# Altium PCB MSP432_MAIN(1).PcbDoc (part 2 of 2)
Units mil, origin at the board's own origin, x right, y up, seen from the top; angles counter-clockwise.
Board outline 3910 x 2910 mil, 2 copper layers (Top Layer, Bottom Layer); 62 components, 84 nets, 279 pads, 146 vias.
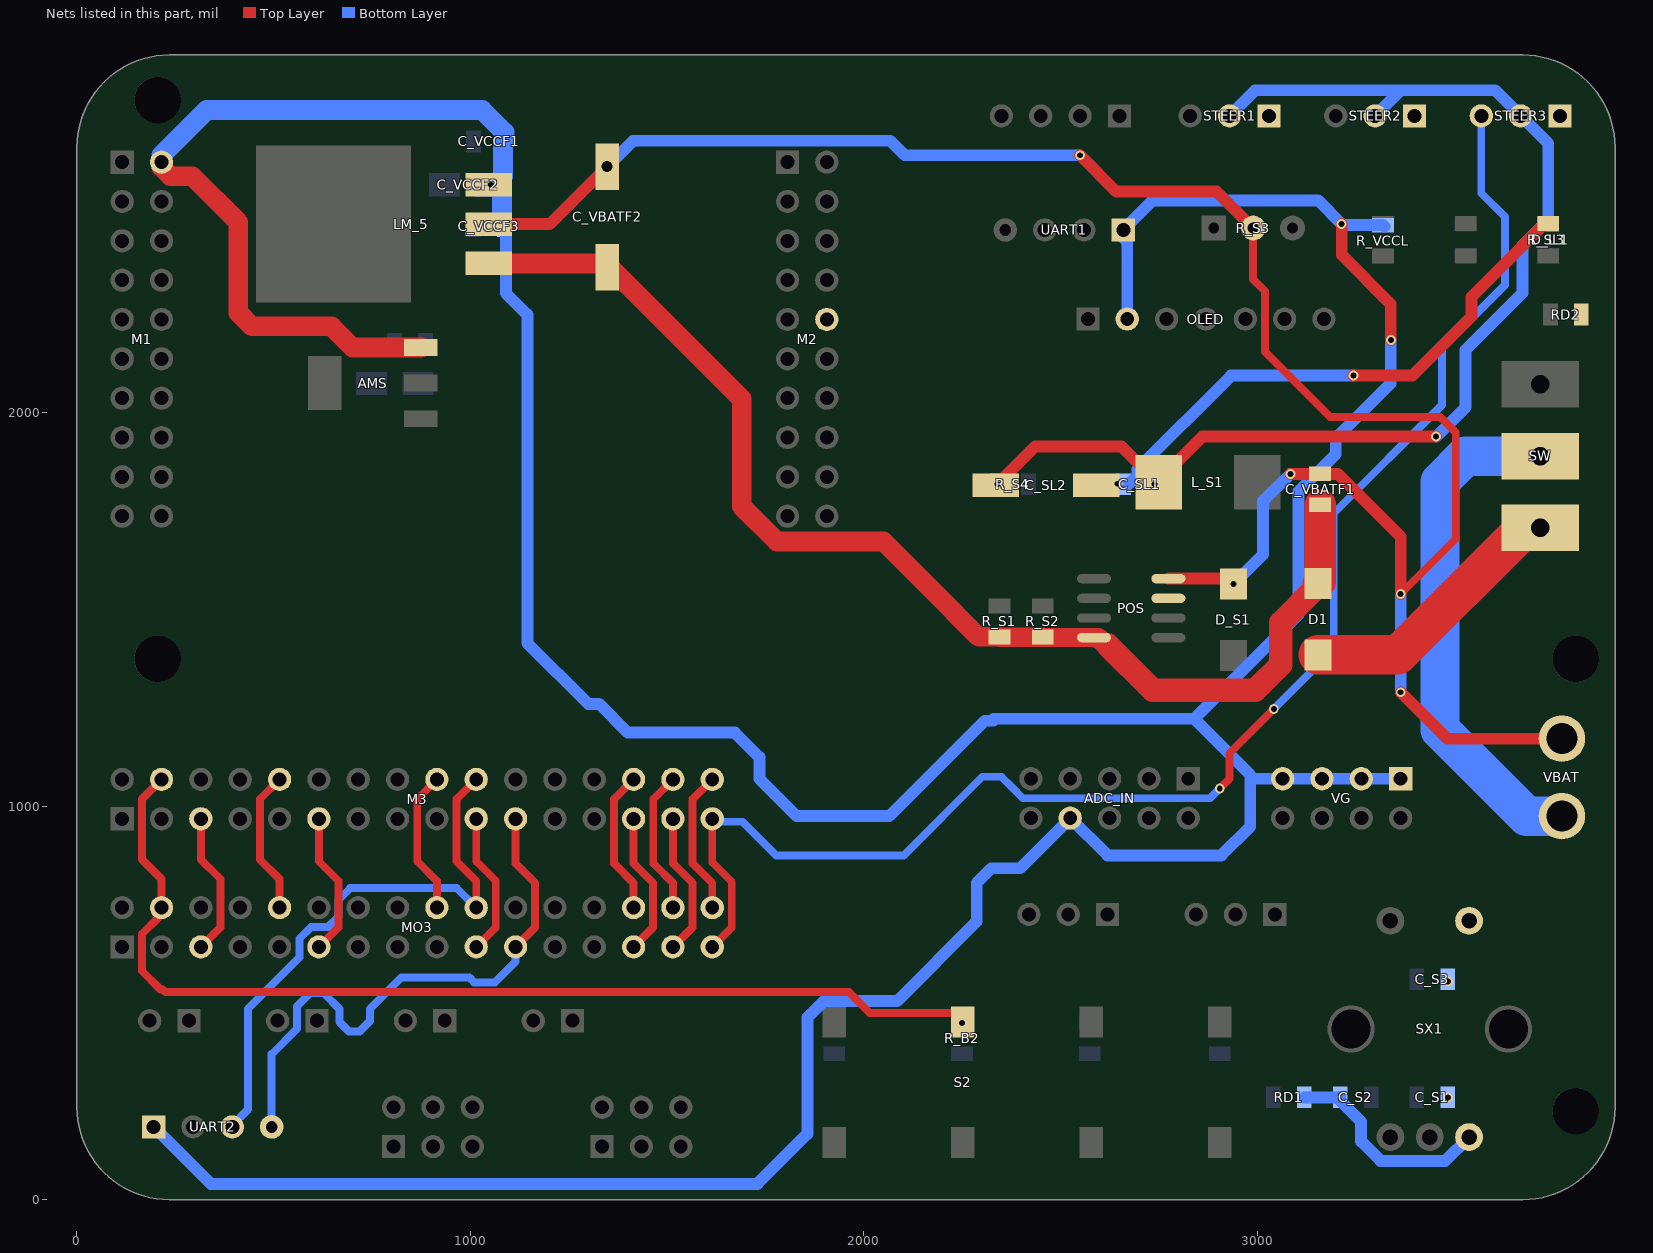
[diagram p2: the nets of this part, all layers, seen from the top]

## Via types
v1: diameter 25, hole 15, Top Layer to Bottom Layer, 145 vias
v2: diameter 50, hole 28, Top Layer to Bottom Layer, 1 vias

## Nets (pads, with @x,y where several pads share a name; then routed paths per layer and width w, separated by ;. In a path a pad name is that pad's centre, name@x,y a point inside that pad or via, vN(x,y) a via of type N, cw(c..) or ccw(c..) an arc to the next point about the centre after c; other vN are vias at no path point) (continued)
P9.0: M3.4 MO3.4 R_B2.2 S2.1 | length 2687.9
  Top Layer w20: M3.4@215,1068.19 165.47,1018.66 165.47,864.53 215,815 MO3.4@215,742.48 207.53,735.01 207.53,717.53 165,675 165,582.02 212.49,534.53 217.94,534.53 224.97,527.5 1962.5,527.5 2015,475 2224.37,475 v1(2250,449.37)
P9.1: M3.5 MO3.5 | length 366.7
  Top Layer w20: MO3.5@315,642.48 364.53,692.01 364.53,815.47 315,865 M3.5@315,968.19
P9.2: M3.10 MO3.10 | length 367.1
  Top Layer w20: MO3.10@515,742.48 515,815 465,865 465,1018.19 M3.10@515,1068.19
P9.3: M3.11 MO3.11 | length 366.7
  Top Layer w20: MO3.11@615,642.48 664.53,692.01 664.53,810.47 615,860 M3.11@615,968.19
P9.4: M3.18 MO3.18 | length 367.1
  Top Layer w20: MO3.18@915,742.48 915,810 865,860 865,1018.19 M3.18@915,1068.19
P9.5: M3.19 MO3.19 | length 366.7
  Top Layer w20: MO3.19@1015,642.48 1064.53,692.01 1064.53,810.47 1015,860 M3.19@1015,968.19
P9.6: M3.20 MO3.20 UART2.3 | length 1464.1
  Top Layer w20: MO3.20@1015,742.48 1015,810 965,860 965,1018.19 M3.20@1015,1068.19
  Bottom Layer w20: UART2.3@395,185 395,189.18 435,229.18 435,485 565.47,615.47 565.47,663 595.43,692.95 637.95,692.95 664.53,719.53 664.53,762.05 694.49,792.01 965.47,792.01 MO3.20@1015,742.48
P9.7: M3.21 MO3.21 UART2.4 | length 1468.5
  Top Layer w20: MO3.21@1115,642.48 1164.53,692.01 1164.53,805.33 1115,854.86 M3.21@1115,968.19
  Bottom Layer w20: UART2.4@495,185 495,369.96 559.53,434.48 559.53,491.87 592.66,525 627.34,525 667.44,484.9 667.44,451.6 691.54,427.5 718.46,427.5 745,454.04 745,485 824.53,564.53 997.66,564.53 1009.69,552.5 1062.5,552.5 1115,605 MO3.21@1115,642.48
P10.0: M3.28 MO3.28 | length 367.1
  Top Layer w20: MO3.28@1415,742.48 1415,805 1365,855 1365,1018.19 M3.28@1415,1068.19
P10.1: M3.27 MO3.27 | length 366.7
  Top Layer w20: MO3.27@1415,642.48 1464.53,692.01 1464.53,805.47 1415,855 M3.27@1415,968.19
P10.2: M3.30 MO3.30 | length 367.1
  Top Layer w20: MO3.30@1515,742.48 1515,805 1465,855 1465,1018.19 M3.30@1515,1068.19
P10.3: M3.29 MO3.29 | length 366.7
  Top Layer w20: MO3.29@1515,642.48 1564.53,692.01 1564.53,805.47 1515,855 M3.29@1515,968.19
P10.4: M3.32 MO3.32 | length 367.1
  Top Layer w20: MO3.32@1615,742.48 1615,805 1565,855 1565,1018.19 M3.32@1615,1068.19
P10.5: M3.31 MO3.31 STEER3.3 | length 3846.1
  Top Layer w20: MO3.31@1615,642.48 1664.53,692.01 1664.53,807.9 1615,857.43 M3.31@1615,968.19 ; v1(2905,1045) 2930,1070 2930,1135 v1(3042.5,1247.5)
  Bottom Layer w20: M3.31@1615,968.19 1622.47,960.72 1691.86,960.72 1777.57,875 2101.46,875 2301.46,1075 2350,1075 2375.47,1049.53 ; 2375.47,1049.49 2404.49,1020.47 2880.47,1020.47 v1(2905,1045) ; v1(3042.5,1247.5) 3195,1400 3195,1745 3470,2020 3470,2165 3630,2325 3630,2498.5 3570,2558.5 STEER3.3@3570,2755
RST: M2.10
STEERGND: C_SL1.1 C_SL2.2 D_L3.2 RD2.1 STEER1.1 STEER2.1 STEER3.1 | length 1392.8
  Top Layer w30: v1(3245,2095) 3395,2095 3545.28,2245.28 3545.28,2295 3731.62,2481.34 D_L3.2@3740.48,2481.34
  Bottom Layer w30: C_SL1.1@2660.63,1818.7 2673.7,1818.7 2695.67,1840.67 2695.67,1856.62 2934.05,2095 v1(3245,2095)
  other v1: 2645,1820
VBAT: C_VBATF1.2 C_VBATF2.1 D1.2 LM_5.1 POS.4 R_S1.1 R_S2.1 | length 3088.5
  Top Layer w40: POS.4@2585.51,1428.7 POS.4@2596.3,1428.7
  Top Layer w50: LM_5.1@1046.48,2380 1345.47,2380 1690,2035.47 1690,1762.56 1779.61,1672.95 2049.87,1672.95 2230.32,1492.5 ; 2232.5,1490.32 2292.2,1430.63 R_S1.1@2345,1430.63 ; R_S1.1@2345,1429.33 2455,1429.33 POS.4@2585.51,1428.7 ; POS.4@2596.3,1428.7 2615,1410
  Top Layer w60: 2620,1410 2735,1295 2995,1295 3060,1360 3060,1466.18 3155,1561.18 D1.2@3155,1566.1
  Top Layer w80: D1.2@3155,1566.1 3160,1571.1 C_VBATF1.2@3160,1766.26
VBATGND: C_S1.1 C_S2.1 C_S3.1 C_VBATF1.1 C_VBATF2.2 D_S1.1 LM_5.2 POS.7 POS.8 R_S3.2 RD1.1 SX1.1 SX1.4 VBAT.2 | length 5745.1
  Top Layer w20: R_S3.2@2990,2470 2990,2339.18 3020,2309.18 3020,2155.5 3185.5,1990 3465,1990 3505,1950 3505,1680 v1(3365,1540)
  Top Layer w30: LM_5.2@1046.48,2480 1201.78,2480 v2(1347.8,2626.03) ; v1(2550,2655) 2642.52,2562.48 2897.52,2562.48 R_S3.2@2990,2470 ; POS.8@2774.49,1578.7 2926.3,1578.7 v1(2940,1565) ; v1(3085,1845) C_VBATF1.1@3160,1845 3205,1845 3365,1685 v1(3365,1540) ; v1(3365,1290) 3483.15,1171.85 VBAT.2@3775,1171.85
  Bottom Layer w30: v2(1347.8,2626.03) 1413.78,2692.01 2067.22,2692.01 2104.23,2655 v1(2550,2655) ; v1(2940,1565) 3015,1640 3015,1775 v1(3085,1845) ; RD1.1@3120,260 C_S2.1@3211.26,260 3211.26,251.14 3264.43,197.97 3264.43,148.04 3313.9,98.57 3478.5,98.57 SX1.1@3538.94,159 ; v1(3365,1290) v1(3365,1540)
  other v1: 3485,260 3485,555
VCC: ADC_IN.8 AMS.3 C_VCCF1.2 C_VCCF2.1 C_VCCF3.2 LM_5.3 M1.2 OLED.2 R_VCCL.2 UART1.1 UART2.1 VG.1 VG.3 VG.5 VG.7 | length 12004.8
  Top Layer w30: v1(3215,2480) 3215,2401.57 3340,2276.57 v1(3340,2185)
  Top Layer w50: M1.2@215,2637.48 215,2625 237.99,2602.01 292.99,2602.01 410,2485 410,2255 445,2220 647.13,2220 700.98,2166.15 AMS.3@873.98,2166.15
  Bottom Layer w30: UART2.1@195,185 340,40 1730,40 1857.01,167.01 1857.01,462.99 1899.01,505 2085,505 2287.5,707.5 2287.5,805.53 2324.47,842.5 2397.5,842.5 ADC_IN.8@2525,970 2620,875 2909.5,875 2982.5,948 2982.5,1080 2840,1222.5 ; C_VCCF3.2@1086.85,2475 1086.85,2466.14 1090.55,2462.44 1090.55,2304.45 1145,2250 1145,1414.89 1299.56,1260.33 1327.25,1260.33 1400.08,1187.5 1672.5,1187.5 1735,1125 1735,1070 1830,975 2065,975 2307.5,1217.5 2330,1217.5 ; 2330,1222.5 2840,1222.5 ; OLED.2@2670,2238.7 2670,2435 2660,2445 UART1.1@2660,2465 2735,2540 3155,2540 v1(3215,2480) 3217.6,2477.4 R_VCCL.2@3320,2477.4 R_VCCL.2@3323.7,2473.7 ; 2990,1070 VG.7@3065,1070 VG.5@3165,1070 VG.3@3265,1070 VG.1@3365,1070 ; v1(3340,2185) 3340,2075 3200,1935 3200,1895 3105,1800 3105,1487.5 2840,1222.5
  Bottom Layer w50: M1.2@215,2637.48 215,2655 330,2770 1030,2770 1086.85,2713.15 C_VCCF1.2@1086.85,2690 ; v1(1052.48,2580) 1062.32,2580 1083.11,2600.79 C_VCCF1.2@1083.11,2690 ; C_VCCF2.1@1080.55,2561.77 1080.55,2477.56 1083.11,2475 C_VCCF3.2@1086.85,2475
VCC_STEER: C_SL1.2 C_SL2.1 L_S1.2 R_S4.1 R_SL1.2 STEER1.2 STEER2.2 STEER3.2 | length 3107.8
  Top Layer w30: v1(2340,1818.7) 2436.3,1915 2655,1915 2739.37,1830.63 v1(2739.37,1818.7) 2860.67,1940 v1(3455,1940)
  Bottom Layer w30: STEER1.2@2930,2755 2995,2820 3365,2820 ; STEER2.2@3300,2755 3365,2820 ; v1(3455,1940) 3530,2015 3530,2160 3675,2305 3675,2425.78 3731.62,2482.4 R_SL1.2@3740,2482.4 ; R_SL1.2@3740,2479.37 R_SL1.2@3740,2482.4 ; 3365,2820 3605,2820 STEER3.2@3670,2755 3740,2685 R_SL1.2@3740,2482.4
VINBAT: D1.1 SW.1 | length 698.8
  Top Layer w100: D1.1@3155,1385 3357.63,1385 3680.63,1708 SW.1@3720,1708
VINNBAT: SW.2 VBAT.1 | length 1313.1
  Bottom Layer w100: SW.2@3720,1890 3530,1890 3465,1825 3465,1195 3685,975 VBAT.1@3775,975
pads on no net: AMS.4 LM_5.4 R_S3.1 SW.3 SX1.6 SX1.7
copper on no net: | length 8936.2
  Bottom Layer w1.35: 775.76,1694.88 794.7,1694.88 ; 775.76,1696.24 794.7,1696.24 ; 775.76,1697.59 794.7,1697.59 ; 777.11,1692.18 790.64,1692.18 ; 777.11,1693.53 793.35,1693.53 ; 777.11,1698.94 793.35,1698.94 ; 777.11,1700.3 793.35,1700.3 ; 778.47,1669.18 825.82,1669.18 ; 778.47,1670.53 828.53,1670.53 ; 778.47,1671.88 829.88,1671.88 ; 778.47,1701.65 801.47,1701.65 ; 779.82,1667.82 823.12,1667.82 ; 779.82,1673.23 831.24,1673.23 ; 779.82,1703 801.47,1703 ; 781.17,1674.59 832.59,1674.59 ; 781.17,1675.94 802.82,1675.94 ; 781.17,1704.36 800.12,1704.36 ; 782.53,1705.71 797.41,1705.71 ; 783.88,1677.29 801.47,1677.29 ; 785.23,1678.65 801.47,1678.65 ; 785.23,1723.3 836.65,1723.3 ; 785.23,1724.65 836.65,1724.65 ; 785.23,1726 836.65,1726 ; 786.59,1666.47 819.06,1666.47 ; 786.59,1721.95 815,1721.95 ; 786.59,1727.36 836.65,1727.36 ; 786.59,1728.71 816.35,1728.71 ; 787.94,1680 801.47,1680 ; 787.94,1707.06 797.41,1707.06 ; 787.94,1730.06 813.65,1730.06 ; 789.29,1681.35 802.82,1681.35 ; 790.64,1682.71 802.82,1682.71 ; 792,1684.06 802.82,1684.06 ; 793.35,1685.41 804.18,1685.41 ; 793.35,1731.42 812.29,1731.42 ; 794.7,1686.77 804.18,1686.77 ; 796.06,1688.12 823.12,1688.12 ; 796.06,1698.94 804.18,1698.94 ; 796.06,1700.3 802.82,1700.3 ; 797.41,1689.47 823.12,1689.47 ; 797.41,1697.59 806.88,1697.59 ; 797.41,1736.83 812.29,1736.83 ; 797.41,1738.18 813.65,1738.18 ; 797.41,1739.54 813.65,1739.54 ; 797.41,1740.89 815,1740.89 ; 798.76,1690.82 823.12,1690.82 ; 798.76,1696.24 821.77,1696.24 ; 798.76,1734.12 812.29,1734.12 ; 798.76,1735.48 812.29,1735.48 ; 798.76,1742.24 816.35,1742.24 ; 800.12,1692.18 823.12,1692.18 ; 800.12,1693.53 821.77,1693.53 ; 800.12,1694.88 821.77,1694.88 ; 800.12,1732.77 812.29,1732.77 ; 800.12,1743.59 816.35,1743.59 ; 801.47,1744.95 815,1744.95 ; 802.82,1720.59 815,1720.59 ; 804.18,1716.53 817.71,1716.53 ; 804.18,1717.89 816.35,1717.89 ; 804.18,1719.24 816.35,1719.24 ; 804.18,1746.3 813.65,1746.3 ; 805.53,1685.41 821.77,1685.41 ; 805.53,1686.77 821.77,1686.77 ; 805.53,1713.83 819.06,1713.83 ; 805.53,1715.18 817.71,1715.18 ; 806.88,1680 815,1680 ; 806.88,1681.35 816.35,1681.35 ; 806.88,1682.71 819.06,1682.71 ; 806.88,1684.06 820.41,1684.06 ; 806.88,1712.47 820.41,1712.47 ; 808.23,1711.12 820.41,1711.12 ; 809.59,1697.59 821.77,1697.59 ; 809.59,1709.77 821.77,1709.77 ; 810.94,1698.94 821.77,1698.94 ; 810.94,1708.41 823.12,1708.41 ; 812.29,1707.06 832.59,1707.06 ; 813.65,1700.3 820.41,1700.3 ; 813.65,1705.71 827.18,1705.71 ; 816.35,1704.36 829.88,1704.36 ; 816.35,1721.95 839.36,1721.95 ; 819.06,1675.94 833.94,1675.94 ; 819.06,1703 831.24,1703 ; 821.77,1677.29 835.3,1677.29 ; 821.77,1716.53 851.53,1716.53 ; 821.77,1717.89 851.53,1717.89 ; 821.77,1719.24 851.53,1719.24 ; 821.77,1720.59 850.18,1720.59 ; 821.77,1728.71 838,1728.71 ; 821.77,1730.06 838,1730.06 ; 823.12,1678.65 835.3,1678.65 ; 823.12,1701.65 833.94,1701.65 ; 823.12,1709.77 833.94,1709.77 ; 823.12,1711.12 835.3,1711.12 ; 823.12,1712.47 850.18,1712.47 ; 823.12,1713.83 851.53,1713.83 ; 823.12,1715.18 851.53,1715.18 ; 823.12,1731.42 839.36,1731.42 ; 823.12,1732.77 839.36,1732.77 ; 823.12,1734.12 840.71,1734.12 ; 824.47,1680 836.65,1680 ; 824.47,1708.41 832.59,1708.41 ; 824.47,1735.48 842.06,1735.48 ; 825.82,1681.35 836.65,1681.35 ; 825.82,1682.71 852.89,1682.71 ; 825.82,1684.06 852.89,1684.06 ; 825.82,1736.83 843.41,1736.83 ; 827.18,1685.41 838,1685.41 ; 827.18,1686.77 838,1686.77 ; 827.18,1688.12 838,1688.12 ; 827.18,1689.47 838,1689.47 ; 827.18,1690.82 850.18,1690.82 ; 827.18,1692.18 850.18,1692.18 ; 827.18,1738.18 843.41,1738.18 ; 828.53,1693.53 848.83,1693.53 ; 828.53,1700.3 835.3,1700.3 ; 829.88,1694.88 842.06,1694.88 ; 831.24,1739.54 843.41,1739.54 ; 833.94,1696.24 840.71,1696.24 ; 836.65,1711.12 850.18,1711.12 ; 838,1680 855.59,1680 ; 838,1681.35 854.24,1681.35 ; 838,1740.89 843.41,1740.89 ; 839.36,1678.65 855.59,1678.65 ; 839.36,1685.41 851.53,1685.41 ; 839.36,1686.77 851.53,1686.77 ; 839.36,1688.12 850.18,1688.12 ; 839.36,1689.47 850.18,1689.47 ; 839.36,1709.77 850.18,1709.77 ; 840.71,1673.23 855.59,1673.23 ; 840.71,1674.59 855.59,1674.59 ; 840.71,1675.94 855.59,1675.94 ; 840.71,1677.29 855.59,1677.29 ; 842.06,1670.53 854.24,1670.53 ; 842.06,1671.88 855.59,1671.88 ; 843.41,1667.82 852.89,1667.82 ; 843.41,1669.18 852.89,1669.18 ; 843.41,1694.88 847.47,1694.88 ; 844.77,1666.47 851.53,1666.47 ; 867.77,1685.41 877.24,1685.41 ; 867.77,1686.77 875.89,1686.77 ; 867.77,1688.12 874.54,1688.12 ; 867.77,1705.71 892.12,1705.71 ; 867.77,1707.06 889.42,1707.06 ; 869.12,1684.06 879.95,1684.06 ; 869.12,1689.47 871.83,1689.47 ; 869.12,1701.65 881.3,1701.65 ; 869.12,1703 879.95,1703 ; 869.12,1704.36 893.48,1704.36 ; 869.12,1708.41 886.71,1708.41 ; 870.48,1682.71 881.3,1682.71 ; 870.48,1700.3 882.65,1700.3 ; 870.48,1709.77 884.01,1709.77 ; 871.83,1681.35 884.01,1681.35 ; 871.83,1697.59 884.01,1697.59 ; 871.83,1698.94 882.65,1698.94 ; 873.18,1680 902.95,1680 ; 873.18,1696.24 885.36,1696.24 ; 873.18,1711.12 879.95,1711.12 ; 874.54,1678.65 902.95,1678.65 ; 875.89,1677.29 902.95,1677.29 ; 875.89,1694.88 901.6,1694.88 ; 877.24,1675.94 901.6,1675.94 ; 877.24,1693.53 901.6,1693.53 ; 879.95,1674.59 901.6,1674.59 ; 879.95,1692.18 902.95,1692.18 ; 881.3,1673.23 900.24,1673.23 ; 881.3,1690.82 902.95,1690.82 ; 881.3,1703 894.83,1703 ; 882.65,1701.65 896.18,1701.65 ; 884.01,1671.88 898.89,1671.88 ; 884.01,1689.47 902.95,1689.47 ; 884.01,1700.3 897.54,1700.3 ; 885.36,1698.94 898.89,1698.94 ; 886.71,1697.59 898.89,1697.59 ; 888.07,1688.12 902.95,1688.12 ; 888.07,1696.24 900.24,1696.24 ; 889.42,1681.35 902.95,1681.35 ; 889.42,1682.71 902.95,1682.71 ; 890.77,1684.06 902.95,1684.06 ; 890.77,1685.41 902.95,1685.41 ; 890.77,1686.77 902.95,1686.77
  Bottom Layer w1.37: 740.56,1579.18 752.89,1579.18 ; 740.56,1580.54 751.52,1580.54 ; 740.56,1581.91 751.52,1581.91 ; 740.56,1583.28 751.52,1583.28 ; 740.56,1584.65 750.15,1584.65 ; 740.56,1586.02 750.15,1586.02 ; 740.56,1587.39 750.15,1587.39 ; 740.56,1588.76 750.15,1588.76 ; 740.56,1590.13 750.15,1590.13 ; 740.56,1591.5 750.15,1591.5 ; 740.56,1592.87 750.15,1592.87 ; 740.56,1594.24 777.54,1594.24 ; 740.56,1595.61 774.8,1595.61 ; 741.93,1575.07 754.26,1575.07 ; 741.93,1576.44 752.89,1576.44 ; 741.93,1577.81 752.89,1577.81 ; 741.93,1596.98 773.43,1596.98 ; 741.93,1598.35 772.06,1598.35 ; 743.3,1570.96 757,1570.96 ; 743.3,1572.33 755.63,1572.33 ; 743.3,1573.7 754.26,1573.7 ; 743.3,1599.72 770.69,1599.72 ; 744.67,1568.22 758.37,1568.22 ; 744.67,1569.59 757,1569.59 ; 744.67,1601.09 767.95,1601.09 ; 746.04,1565.48 759.74,1565.48 ; 746.04,1566.85 759.74,1566.85 ; 746.04,1602.46 765.21,1602.46 ; 746.04,1603.83 762.47,1603.83 ; 747.41,1562.74 762.47,1562.74 ; 747.41,1564.11 761.1,1564.11 ; 748.78,1560 765.21,1560 ; 748.78,1561.37 763.84,1561.37 ; 748.78,1605.2 758.37,1605.2 ; 750.15,1558.63 766.58,1558.63 ; 751.52,1555.89 769.32,1555.89 ; 751.52,1557.26 767.95,1557.26 ; 752.89,1554.52 770.69,1554.52 ; 752.89,1592.87 778.91,1592.87 ; 754.26,1553.15 773.43,1553.15 ; 755.63,1551.78 774.8,1551.78 ; 755.63,1591.5 780.28,1591.5 ; 757,1550.41 777.54,1550.41 ; 757,1590.13 781.65,1590.13 ; 758.37,1549.04 780.28,1549.04 ; 759.74,1547.67 793.98,1547.67 ; 761.1,1546.3 792.61,1546.3 ; 762.47,1544.93 792.61,1544.93 ; 762.47,1588.76 781.65,1588.76 ; 763.84,1543.56 791.24,1543.56 ; 765.21,1587.39 783.02,1587.39 ; 766.58,1542.19 789.87,1542.19 ; 766.58,1586.02 784.39,1586.02 ; 767.95,1540.82 788.5,1540.82 ; 767.95,1584.65 785.76,1584.65 ; 769.32,1583.28 785.76,1583.28 ; 770.69,1581.91 787.13,1581.91 ; 772.06,1539.46 785.76,1539.46 ; 772.06,1579.18 788.5,1579.18 ; 772.06,1580.54 788.5,1580.54 ; 773.43,1577.81 789.87,1577.81 ; 774.8,1575.07 791.24,1575.07 ; 774.8,1576.44 791.24,1576.44 ; 776.17,1573.7 792.61,1573.7 ; 777.54,1570.96 792.61,1570.96 ; 777.54,1572.33 792.61,1572.33 ; 778.91,1568.22 793.98,1568.22 ; 778.91,1569.59 793.98,1569.59 ; 780.28,1565.48 795.35,1565.48 ; 780.28,1566.85 793.98,1566.85 ; 781.65,1549.04 793.98,1549.04 ; 781.65,1561.37 795.35,1561.37 ; 781.65,1562.74 795.35,1562.74 ; 781.65,1564.11 795.35,1564.11 ; 783.02,1550.41 795.35,1550.41 ; 783.02,1551.78 795.35,1551.78 ; 783.02,1553.15 795.35,1553.15 ; 783.02,1554.52 795.35,1554.52 ; 783.02,1555.89 795.35,1555.89 ; 783.02,1557.26 795.35,1557.26 ; 783.02,1558.63 795.35,1558.63 ; 783.02,1560 795.35,1560 ; 788.5,1586.02 803.56,1586.02 ; 788.5,1587.39 802.19,1587.39 ; 788.5,1588.76 800.82,1588.76 ; 788.5,1590.13 799.46,1590.13 ; 788.5,1591.5 798.09,1591.5 ; 788.5,1592.87 798.09,1592.87 ; 788.5,1594.24 799.46,1594.24 ; 788.5,1595.61 830.96,1595.61 ; 788.5,1596.98 830.96,1596.98 ; 789.87,1583.28 806.3,1583.28 ; 789.87,1584.65 804.93,1584.65 ; 789.87,1598.35 829.59,1598.35 ; 789.87,1599.72 828.22,1599.72 ; 789.87,1601.09 825.48,1601.09 ; 791.24,1580.54 810.41,1580.54 ; 791.24,1581.91 809.04,1581.91 ; 791.24,1602.46 821.37,1602.46 ; 791.24,1603.83 817.26,1603.83 ; 792.61,1579.18 813.15,1579.18 ; 792.61,1605.2 810.41,1605.2 ; 793.98,1577.81 815.89,1577.81 ; 795.35,1576.44 817.26,1576.44 ; 796.72,1575.07 820,1575.07 ; 798.09,1554.52 813.15,1554.52 ; 799.46,1550.41 844.65,1550.41 ; 799.46,1551.78 826.85,1551.78 ; 799.46,1553.15 820,1553.15 ; 799.46,1555.89 807.67,1555.89 ; 799.46,1573.7 822.74,1573.7 ; 800.82,1547.67 844.65,1547.67 ; 800.82,1549.04 844.65,1549.04 ; 800.82,1572.33 825.48,1572.33 ; 802.19,1546.3 844.65,1546.3 ; 803.56,1544.93 844.65,1544.93 ; 803.56,1570.96 826.85,1570.96 ; 804.93,1543.56 843.28,1543.56 ; 804.93,1569.59 829.59,1569.59 ; 804.93,1594.24 832.33,1594.24 ; 807.67,1542.19 843.28,1542.19 ; 807.67,1568.22 830.96,1568.22 ; 809.04,1566.85 832.33,1566.85 ; 810.41,1540.82 841.91,1540.82 ; 810.41,1592.87 832.33,1592.87 ; 811.78,1565.48 833.7,1565.48 ; 813.15,1591.5 833.7,1591.5 ; 814.52,1539.46 840.54,1539.46 ; 814.52,1564.11 835.07,1564.11 ; 814.52,1581.91 835.07,1581.91 ; 814.52,1583.28 835.07,1583.28 ; 815.89,1562.74 837.81,1562.74 ; 815.89,1584.65 835.07,1584.65 ; 817.26,1580.54 835.07,1580.54 ; 817.26,1590.13 833.7,1590.13 ; 818.63,1561.37 837.81,1561.37 ; 818.63,1588.76 833.7,1588.76 ; 820,1560 839.18,1560 ; 821.37,1587.39 835.07,1587.39 ; 822.74,1558.63 840.54,1558.63 ; 822.74,1579.18 835.07,1579.18 ; 822.74,1586.02 835.07,1586.02 ; 824.11,1557.26 841.91,1557.26 ; 826.85,1538.09 836.44,1538.09 ; 826.85,1555.89 843.28,1555.89 ; 828.22,1554.52 843.28,1554.52 ; 830.96,1553.15 844.65,1553.15 ; 832.33,1551.78 844.65,1551.78 ; 839.18,1579.18 851.5,1579.18 ; 839.18,1580.54 850.13,1580.54 ; 839.18,1581.91 850.13,1581.91 ; 839.18,1583.28 850.13,1583.28 ; 839.18,1584.65 848.76,1584.65 ; 839.18,1586.02 848.76,1586.02 ; 839.18,1587.39 848.76,1587.39 ; 839.18,1588.76 848.76,1588.76 ; 839.18,1590.13 848.76,1590.13 ; 839.18,1591.5 848.76,1591.5 ; 839.18,1592.87 848.76,1592.87 ; 839.18,1594.24 876.16,1594.24 ; 839.18,1595.61 873.42,1595.61 ; 840.54,1575.07 852.87,1575.07 ; 840.54,1576.44 851.5,1576.44 ; 840.54,1577.81 851.5,1577.81 ; 840.54,1596.98 872.05,1596.98 ; 840.54,1598.35 870.68,1598.35 ; 841.91,1570.96 855.61,1570.96 ; 841.91,1572.33 854.24,1572.33 ; 841.91,1573.7 852.87,1573.7 ; 841.91,1599.72 869.31,1599.72 ; 843.28,1568.22 856.98,1568.22 ; 843.28,1569.59 855.61,1569.59 ; 843.28,1601.09 866.57,1601.09 ; 844.65,1565.48 858.35,1565.48 ; 844.65,1566.85 858.35,1566.85 ; 844.65,1602.46 863.83,1602.46 ; 844.65,1603.83 861.09,1603.83 ; 846.02,1562.74 861.09,1562.74 ; 846.02,1564.11 859.72,1564.11 ; 847.39,1560 863.83,1560 ; 847.39,1561.37 862.46,1561.37 ; 847.39,1605.2 856.98,1605.2 ; 848.76,1558.63 865.2,1558.63 ; 850.13,1555.89 867.94,1555.89 ; 850.13,1557.26 866.57,1557.26 ; 851.5,1554.52 869.31,1554.52 ; 851.5,1592.87 877.53,1592.87 ; 852.87,1553.15 872.05,1553.15 ; 854.24,1551.78 873.42,1551.78 ; 854.24,1591.5 878.9,1591.5 ; 855.61,1550.41 876.16,1550.41 ; 855.61,1590.13 880.26,1590.13 ; 856.98,1549.04 878.9,1549.04 ; 858.35,1547.67 892.59,1547.67 ; 859.72,1546.3 891.22,1546.3 ; 861.09,1544.93 891.22,1544.93 ; 861.09,1588.76 880.26,1588.76 ; 862.46,1543.56 889.85,1543.56 ; 863.83,1587.39 881.63,1587.39 ; 865.2,1542.19 888.48,1542.19 ; 865.2,1586.02 883,1586.02 ; 866.57,1540.82 887.11,1540.82 ; 866.57,1584.65 884.37,1584.65 ; 867.94,1583.28 884.37,1583.28 ; 869.31,1581.91 885.74,1581.91 ; 870.68,1539.46 884.37,1539.46 ; 870.68,1579.18 887.11,1579.18 ; 870.68,1580.54 887.11,1580.54 ; 872.05,1577.81 888.48,1577.81 ; 873.42,1575.07 889.85,1575.07 ; 873.42,1576.44 889.85,1576.44 ; 874.79,1573.7 891.22,1573.7 ; 876.16,1570.96 891.22,1570.96 ; 876.16,1572.33 891.22,1572.33 ; 877.53,1568.22 892.59,1568.22 ; 877.53,1569.59 892.59,1569.59 ; 878.9,1565.48 893.96,1565.48 ; 878.9,1566.85 892.59,1566.85 ; 880.26,1549.04 892.59,1549.04 ; 880.26,1561.37 893.96,1561.37 ; 880.26,1562.74 893.96,1562.74 ; 880.26,1564.11 893.96,1564.11 ; 881.63,1550.41 893.96,1550.41 ; 881.63,1551.78 893.96,1551.78 ; 881.63,1553.15 893.96,1553.15 ; 881.63,1554.52 893.96,1554.52 ; 881.63,1555.89 893.96,1555.89 ; 881.63,1557.26 893.96,1557.26 ; 881.63,1558.63 893.96,1558.63 ; 881.63,1560 893.96,1560 ; 887.11,1586.02 902.18,1586.02 ; 887.11,1587.39 900.81,1587.39 ; 887.11,1588.76 899.44,1588.76 ; 887.11,1590.13 898.07,1590.13 ; 887.11,1591.5 896.7,1591.5 ; 887.11,1592.87 896.7,1592.87 ; 887.11,1594.24 898.07,1594.24 ; 887.11,1595.61 929.57,1595.61 ; 887.11,1596.98 929.57,1596.98 ; 888.48,1583.28 904.92,1583.28 ; 888.48,1584.65 903.55,1584.65 ; 888.48,1598.35 928.2,1598.35 ; 888.48,1599.72 926.83,1599.72 ; 888.48,1601.09 924.09,1601.09 ; 889.85,1580.54 909.03,1580.54 ; 889.85,1581.91 907.66,1581.91 ; 889.85,1602.46 919.98,1602.46 ; 889.85,1603.83 915.88,1603.83 ; 891.22,1579.18 911.77,1579.18 ; 891.22,1605.2 909.03,1605.2 ; 892.59,1577.81 914.51,1577.81 ; 893.96,1576.44 915.88,1576.44 ; 895.33,1575.07 918.62,1575.07 ; 896.7,1554.52 911.77,1554.52 ; 898.07,1550.41 943.27,1550.41 ; 898.07,1551.78 925.46,1551.78 ; 898.07,1553.15 918.62,1553.15 ; 898.07,1555.89 906.29,1555.89 ; 898.07,1573.7 921.35,1573.7 ; 899.44,1547.67 943.27,1547.67 ; 899.44,1549.04 943.27,1549.04 ; 899.44,1572.33 924.09,1572.33 ; 900.81,1546.3 943.27,1546.3 ; 902.18,1544.93 943.27,1544.93 ; 902.18,1570.96 925.46,1570.96 ; 903.55,1543.56 941.9,1543.56 ; 903.55,1569.59 928.2,1569.59 ; 903.55,1594.24 930.94,1594.24 ; 906.29,1542.19 941.9,1542.19 ; 906.29,1568.22 929.57,1568.22 ; 907.66,1566.85 930.94,1566.85 ; 909.03,1540.82 940.53,1540.82 ; 909.03,1592.87 930.94,1592.87 ; 910.4,1565.48 932.31,1565.48 ; 911.77,1591.5 932.31,1591.5 ; 913.14,1539.46 939.16,1539.46 ; 913.14,1564.11 933.68,1564.11 ; 913.14,1581.91 933.68,1581.91 ; 913.14,1583.28 933.68,1583.28 ; 914.51,1562.74 936.42,1562.74 ; 914.51,1584.65 933.68,1584.65 ; 915.88,1580.54 933.68,1580.54 ; 915.88,1590.13 932.31,1590.13 ; 917.25,1561.37 936.42,1561.37 ; 917.25,1588.76 932.31,1588.76 ; 918.62,1560 937.79,1560 ; 919.98,1587.39 933.68,1587.39 ; 921.35,1558.63 939.16,1558.63 ; 921.35,1579.18 933.68,1579.18 ; 921.35,1586.02 933.68,1586.02 ; 922.72,1557.26 940.53,1557.26 ; 925.46,1538.09 935.05,1538.09 ; 925.46,1555.89 941.9,1555.89 ; 926.83,1554.52 941.9,1554.52 ; 929.57,1553.15 943.27,1553.15 ; 930.94,1551.78 943.27,1551.78
  other v1: 535,2400 652.5,2400 770,2400 535,2485 652.5,2485 770,2485 535,2570 652.5,2570 770,2570

## Polygon pours and split planes (outlines as drawn)
GND on Top Layer "Top Layer-GND" (solid, remove dead copper, pour order 6): -380,2640 210,3230 3735,3230 4545,2420 4545,670 3455,-420 3330,-295 -90,-295 -90,605 -290,805
VBATGND on Top Layer "Top Layer-VBATGND" (solid, remove dead copper, pour order 4): 3110,-20 3110,765 3200,855 3585,855 3635,905 3635,1230 3690,1285 3925,1285 3925,45 3845,-35
no net on Top Layer "Top Layer-No Net" (solid, pour order 2): 3060,15
STEERGND on Top Layer "Top Layer-STEERGND" (solid, remove dead copper, pour order 0): 2655,2620 2720,2685 2720,2915 3810,2915 3965,2760 3955,2205 3780,2205 3780,2280 3670,2390 3670,2590 3580,2680 3480,2580 2650,2580
GND on Bottom Layer "Bottom Layer-GND" (solid, remove dead copper, pour order 8): -90,2805 785,3680 3450,3680 4855,2275 4300,1720 4300,-495 425,-495 -65,-5

## Keep-outs
Keep-Out Layer:
  the board outline again, w10

## Other copper
Top Layer:
  rectangle net VBATGND: 2735,1525 2815,1590
  pour cut-out: 3605,2170 3825,2170 3860,2135 3860,2010 3835,1985 3605,1985 3580,2010 3580,2140
Bottom Layer:
  pour cut-out: 3605,2172.5 3825,2172.5 3860,2137.5 3860,2012.5 3835,1987.5 3605,1987.5 3580,2012.5 3580,2142.5

## Silkscreen, mask and mechanical layers (free items; w line width, h text height)
Top Overlay:
  text "P6.4" at 2315,2670 h19.68
  text "P6.5" at 2415,2670 h19.68
  text "GND" at 2525,2670 h19.68
  text "3.3V" at 2620,2670 h19.68
  text "P5.6" at 2795,2670 h19.68
  text "V_STR" at 2890,2670 h19.68
  text "GND" at 3005,2670 h19.68
  text "P5.7" at 3165,2670 h19.68
  text "V_STR" at 3260,2670 h19.68
  text "GND" at 3375,2670 h19.68
  text "P10.1" at 3535,2670 h19.68
  text "V_STR" at 3630,2670 h19.68
  text "GND" at 3745,2670 h19.68
  text "VCC" at 300,2610 h19.68 r90
  text "GND" at 1995,2610 h19.68 r90
  text "3.3V" at 45,2600 h19.68 r90
  text "P2.7" at 1735,2600 h19.68 r90
  text "P3.3" at 2330,2380 h19.68
  text "P3.2" at 2430,2380 h19.68
  text "GND" at 2535,2380 h19.68
  text "VCC" at 2635,2380 h19.68
  text "GND" at 2540,2155 h19.68
  text "VCC" at 2640,2155 h19.68
  text "VCC" at 3035,1140 h19.68
  text "VCC" at 3140,1140 h19.68
  text "VCC" at 3240,1140 h19.68
  text "VCC" at 3340,1140 h19.68
  text "P4.7" at 2390,1135 h19.68
  text "P4.5" at 2485,1135 h19.68
  text "GND" at 2595,1135 h19.68
  text "P4.4" at 2685,1135 h19.68
  text "P4.2" at 2790,1135 h19.68
  text "P8.5" at 40,1045 h19.68 r90
  text "P8.6" at 40,935 h19.68 r90
  text "VCC" at 2500,885 h19.68
  text "GND" at 2600,885 h19.68
  text "3.3V" at 2695,885 h19.68
  text "P4.0" at 2795,885 h19.68
  text "GND" at 3040,885 h19.68
  text "GND" at 3135,885 h19.68
  text "GND" at 3240,885 h19.68
  text "GND" at 3340,885 h19.68
  text "P4.1" at 2390,880 h19.68
  text "P8.5" at 80,805 h19.68
  text "P9.0" at 180,805 h19.68
  text "P8.4" at 280,805 h19.68
  text "P8.1" at 385,805 h19.68
  text "P9.2" at 485,805 h19.68
  text "P6.2" at 590,805 h19.68
  text "P7.3" at 685,805 h19.68
  text "P7.1" at 785,805 h19.68
  text "P9.4" at 880,805 h19.68
  text "P9.6" at 980,805 h19.68
  text "P8.0" at 1080,805 h19.68
  text "P7.4" at 1180,805 h19.68
  text "P7.6" at 1280,805 h19.68
  text "P10.0" at 1370,805 h19.68
  text "P10.2" at 1475,805 h19.68
  text "P10.4" at 1580,805 h19.68
  text "GND" at 2390,635 h19.68
  text "P5.5" at 2490,635 h19.68
  text "3.3V" at 2590,635 h19.68
  text "P5.5" at 2810,635 h19.68
  text "P5.4" at 2915,635 h19.68
  text "P5.2" at 3015,635 h19.68
  text "P8.6" at 80,560 h19.68
  text "P8.7" at 180,560 h19.68
  text "P9.1" at 285,560 h19.68
  text "P8.2" at 390,560 h19.68
  text "P5.3" at 485,560 h19.68
  text "P9.3" at 590,560 h19.68
  text "P6.3" at 690,560 h19.68
  text "P7.2" at 785,560 h19.68
  text "P7.0" at 880,560 h19.68
  text "P9.5" at 980,560 h19.68
  text "P9.7" at 1080,560 h19.68
  text "P7.5" at 1190,560 h19.68
  text "P7.7" at 1290,560 h19.68
  text "P10.1" at 1380,560 h19.68
  text "P10.3" at 1480,560 h19.68
  text "P10.5" at 1585,560 h19.68
  text "P4.5" at 150,515 h19.68
  text "P4.4" at 250,515 h19.68
  text "P3.0" at 475,515 h19.68
  text "P2.3" at 575,515 h19.68
  text "P6.7" at 800,515 h19.68
  text "P6.6" at 900,515 h19.68
  text "P5.0" at 1130,515 h19.68
  text "P5.1" at 1225,515 h19.68
  text "GND" at 1410,305 h19.68
  text "GND" at 880,300 h19.68
  text "P8.7" at 670,225 h19.68
  text "P2.7" at 1080,225 h19.68
  text "P4.1" at 1205,225 h19.68
  text "P2.5" at 1615,225 h19.68
  text "P8.6" at 670,125 h19.68
  text "P2.6" at 1080,125 h19.68
  text "P3.6" at 1200,125 h19.68
  text "P2.4" at 1615,125 h19.68
  text "VCC" at 170,100 h19.68
  text "GND" at 270,100 h19.68
  text "P9.6" at 360,100 h19.68
  text "P9.7" at 465,100 h19.68
  text "GND" at 1415,45 h19.68
  text "GND" at 880,40 h19.68
Mechanical 1:
  the board outline again, w10